# EAGLE board stir-shield (EAGLE 9.3.0)
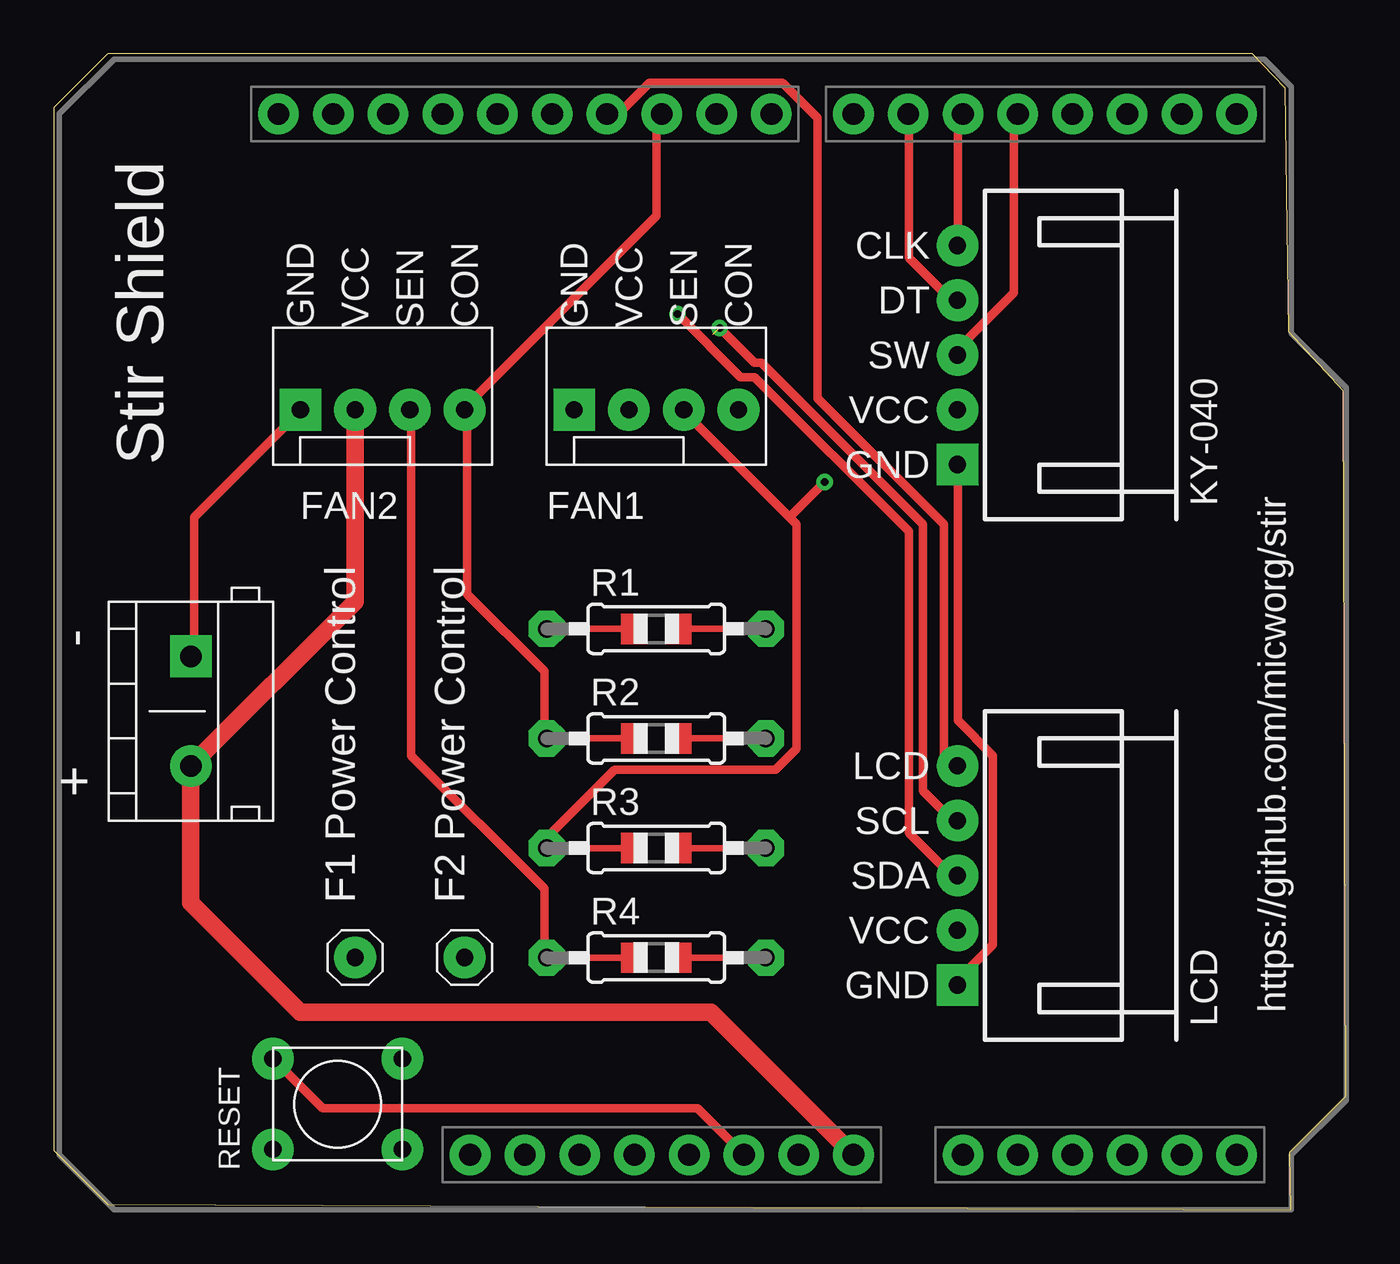
[diagram p0: board, top side]
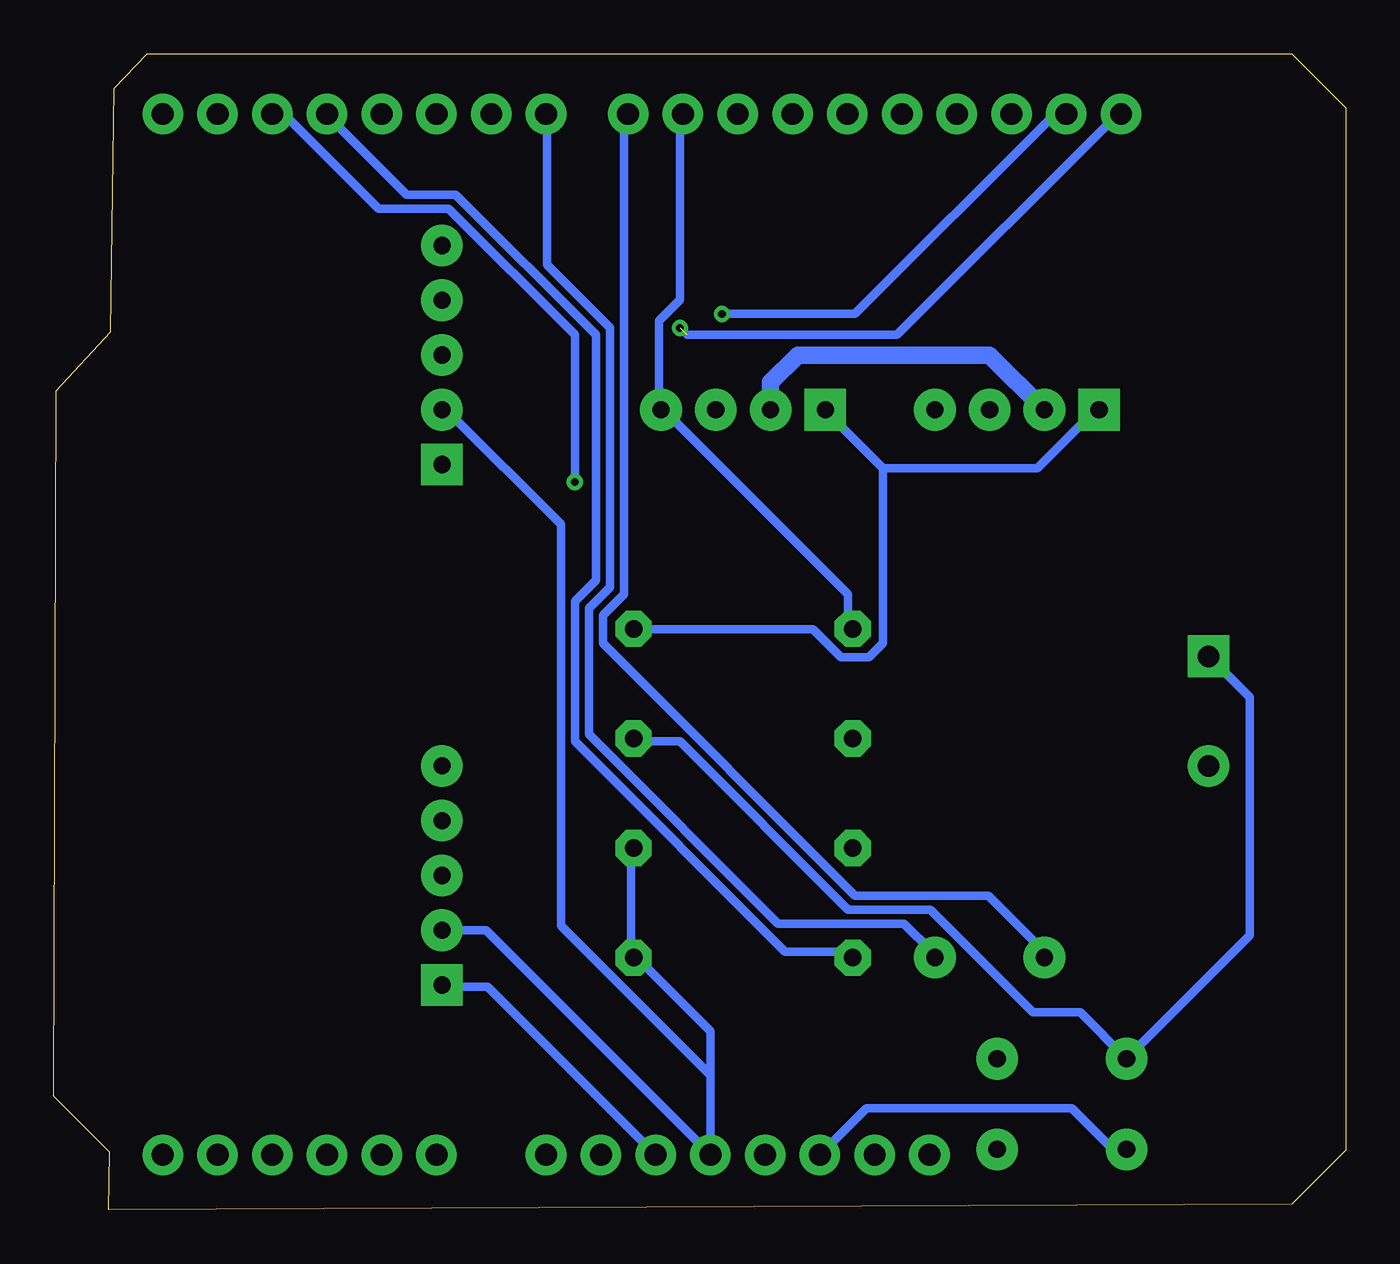
[diagram p1: board, bottom side, seen from below]

Size 59.91 x 53.58 mm. Coordinates in mm from the lower left corner, seen from the top.
Outline: 0,51.08 0,2.75 2.5,0.25 57.37,0 57.32,2.66 59.91,5.27 59.81,37.97 57.28,40.7 57.12,51.99 55.59,53.58 2.5,53.58 0,51.08
Copper layers (1*16): Top 0.035mm / dielectric 1.5mm / Bottom 0.035mm
Design rules "default": minimum track width 6mil, minimum drill 0.35mm, track to track 6mil, track to pad 6mil, pad to pad 6mil, via to via 6mil, smd to smd 6mil, copper to edge 40mil, drill to drill 6mil, minimum pad ring 10mil, minimum via ring 8mil, stop-mask expansion 4mil, vias tented up to drill 0mil, thermal gap 10mil
Net classes: 0 default: width 0.4 mm, clearance 0.25 mm

## Footprints (pad centres in the part's own frame; a part is rotated, then mirrored left to right if it is on the bottom)
UNO_R3_SHIELD_NOLABELS = drill 1.016 pad 1.88: 3.3V 24.13,-3.81; 5V 24.13,-1.27; A0 24.13,11.43; A1 24.13,13.97; A2 24.13,16.51; A3 24.13,19.05; A4 24.13,21.59; A5 24.13,24.13; AREF -24.13,-15.24; D2 -24.13,19.05; D3 -24.13,16.51; D4 -24.13,13.97; D5 -24.13,11.43; D6 -24.13,8.89; D7 -24.13,6.35; D8 -24.13,2.54; D9 -24.13,0; D10 -24.13,-2.54; D11 -24.13,-5.08; D12 -24.13,-7.62; D13 -24.13,-10.16; GND@0 24.13,1.27; GND@1 24.13,3.81; GND@2 -24.13,-12.7; IOREF 24.13,-8.89; NC 24.13,-11.43; RES 24.13,-6.35; RX -24.13,24.13; SCL -24.13,-20.32; SDA -24.13,-17.78; TX -24.13,21.59; VIN 24.13,6.35
4PIN = drill 0.8 pad 1.93 square: P$1 0,0 | drill 0.8 pad 1.93: P$2 2.54,0; P$3 5.08,0; P$4 7.62,0
1PIN = drill 0.8 pad 1.93: P$1 0,0
5PIN_KY-04 = drill 0.8 pad 1.93 square: P$1 0,0 | drill 0.8 pad 1.93: P$2 2.54,0; P$3 5.08,0; P$4 7.62,0; P$5 10.16,0
5PIN_LCD = drill 0.8 pad 1.93 square: P$1 0,0 | drill 0.8 pad 1.93: P$2 2.54,0; P$3 5.08,0; P$4 7.62,0; P$5 10.16,0
0805-THM = drill 0.813 pad 1.676 octagon: 1 -5.08,0; 2 5.08,0
BUTTON = drill 0.8 pad 1.93: P$1 0,0; P$2 4.2,0; P$3 0,-6; P$4 4.2,-6
2PIN = drill 1 pad 1.93 square: P$1 0,0 | drill 1 pad 1.93: P$2 5.08,0

## Placement (x,y rotation side)
B1  ARDUINO_UNO_R3_SHIELDNOLABELS  [UNO_R3_SHIELD_NOLABELS]  30.73,26.67 270 top
FAN1  4PIN  [4PIN]  24.13,37.08 0 top
FAN1-POW-CON  1PIN  [1PIN]  13.97,11.68 0 top
FAN2  4PIN  [4PIN]  11.43,37.08 0 top
FAN2_POW_CON  1PIN  [1PIN]  19.05,11.68 0 top
KY-040  5PIN_KY-04  [5PIN_KY-04]  41.91,34.54 90 top
LCD  5PIN_LCD  [5PIN_LCD]  41.91,10.41 90 top
R1  [0805-THM]  27.94,26.92 0 top
R2  [0805-THM]  27.94,21.84 0 top
R3  [0805-THM]  27.94,16.76 0 top
R4  [0805-THM]  27.94,11.68 0 top
RESET  BUTTON  [BUTTON]  10.16,2.79 90 top
U$1  2PIN  [2PIN]  6.35,25.65 270 top

## Library data of the parts
B1 = SparkFun-Boards
FAN1 FAN1-POW-CON FAN2 FAN2_POW_CON KY-040 LCD RESET U$1 = stir_shield
R1-R4 = adafruit

## Nets
N$1: B1.D8 FAN1-POW-CON.P$1
N$2: B1.VIN FAN1.P$2 FAN2.P$2 U$1.P$2
N$3: B1.D9 FAN1.P$4 R1.1
N$4: B1.D10 FAN2.P$4 R2.1
N$5: B1.5V KY-040.P$2 LCD.P$2 R3.2 R4.2
N$6: B1.D2 FAN1.P$3 R3.1
N$7: B1.D3 FAN2.P$3 R4.1
N$8: B1.D11 LCD.P$5
N$9: B1.D7 FAN2_POW_CON.P$1
N$10: B1.SCL LCD.P$4
N$11: B1.SDA LCD.P$3
N$12: B1.D4 KY-040.P$3
N$13: B1.D6 KY-040.P$4
N$14: B1.D5 KY-040.P$5
N$18: B1.GND@0 FAN1.P$1 FAN2.P$1 KY-040.P$1 LCD.P$1 R1.2 R2.2 RESET.P$2 U$1.P$1
RESET: B1.RES RESET.P$1

## Tracks (layer width: path | path; a pad name or v marks a point on that pad's centre or on a via)
N$1
  Bottom 0.4: B1.D8 33.48,50.63 33.48,28.53 34.45,27.55 34.45,26.25 22.75,14.55 16.57,14.55 13.97,11.95 FAN1-POW-CON.P$1
N$2
  Top 0.813: FAN2.P$2 13.97,28.19 U$1.P$2 6.35,14.22 11.43,9.14 30.48,9.14 B1.VIN
  Bottom 0.813: FAN2.P$2 16.51,39.62 25.4,39.62 26.67,38.35 FAN1.P$2
N$3
  Bottom 0.4: R1.1 23.07,27.23 23.07,28.53 31.52,36.98 FAN1.P$4 31.85,37.3 31.85,41.2 30.88,42.18 30.88,50.63 B1.D9
N$4
  Top 0.4: R2.1 22.75,22.03 22.75,24.95 19.18,28.53 19.18,36.98 FAN2.P$4 19.18,37.3 27.95,46.08 27.95,50.63 B1.D10
N$5
  Bottom 0.4: 41.6,12.93 LCD.P$2 39.88,12.95 B1.5V | KY-040.P$2 41.6,36.98 36.4,31.78 36.4,13.16 29.46,6.22 B1.5V | 33.15,16.83 R3.2 33.15,16.5 33.15,11.95 R4.2 32.83,11.63 29.46,8.27 B1.5V
N$6  (via drill 0.35)
  Top 0.4: 34.12,32.1 29.25,36.98 FAN1.P$3 | 34.12,32.1 34.45,31.78 34.45,21.38 33.48,20.4 26,20.4 22.75,17.15 22.75,16.83 R3.1 | 34.12,32.1 v35.75,33.73
  Bottom 0.4: v35.75,33.73 35.75,40.55 41.6,46.4 44.85,46.4 49.08,50.63 49.73,50.63 B1.D2
N$7
  Top 0.4: R4.1 22.75,11.95 22.75,14.88 16.57,21.05 16.57,36.98 FAN2.P$3
  Bottom 0.4: B1.D3 47.12,50.63 43.55,47.05 41.27,47.05 34.77,40.55 34.77,29.18 35.75,28.2 35.75,21.7 26,11.95 23.07,11.95 R4.1
N$8
  Top 0.4: B1.D11 25.68,50.95 26.32,50.95 27.62,52.25 33.8,52.25 35.42,50.63 35.42,37.63 41.27,31.78 41.27,21.05 41.6,20.73 LCD.P$5
N$9
  Bottom 0.4: B1.D7 37.05,50.63 37.05,43.8 34.12,40.88 34.12,28.85 35.1,27.88 35.1,22.03 26.32,13.25 20.48,13.25 19.18,11.95 FAN2_POW_CON.P$1
N$10  (via drill 0.35)  (1 unrouted)
  Top 0.4: v30.88,40.88 32.5,39.25 32.83,39.25 40.3,31.78 40.3,19.43 41.6,18.13 LCD.P$4
  Bottom 0.4: 30.55,40.55 20.8,40.55 10.72,50.63 B1.SCL
N$11  (via drill 0.35)
  Top 0.4: v28.93,41.53 31.85,38.6 32.5,38.6 39.65,31.45 39.65,17.48 41.6,15.53 LCD.P$3
  Bottom 0.4: v28.93,41.53 22.75,41.53 13.65,50.63 13,50.63 B1.SDA
N$12
  Top 0.4: B1.D4 44.52,50.63 44.52,42.5 41.92,39.9 KY-040.P$3
N$13
  Top 0.4: B1.D6 39.65,50.63 39.65,44.13 41.6,42.18 KY-040.P$4
N$14
  Top 0.4: B1.D5 41.92,50.63 41.92,44.78 KY-040.P$5
N$18
  Top 0.4: KY-040.P$1 41.92,34.38 41.92,22.68 43.55,21.05 43.55,12.28 41.92,10.65 LCD.P$1 | U$1.P$1 6.5,25.93 6.5,32.1 11.38,36.98 FAN2.P$1 | RESET.P$2 12.46,4.7 29.84,4.7 B1.GND@0
  Bottom 0.4: LCD.P$1 41.6,10.33 39.79,10.33 B1.GND@0 | 21.45,34.38 21.45,26.25 22.1,25.6 23.4,25.6 24.7,26.9 32.83,26.9 R1.2 | 21.45,34.38 24.05,36.98 FAN1.P$1 | 21.45,34.38 14.3,34.38 11.7,36.98 FAN2.P$1 | 23.07,13.9 23.13,13.96 | 23.13,13.96 30.88,21.7 32.83,21.7 R2.2 | U$1.P$1 4.45,23.75 4.45,12.71 RESET.P$2 12.31,9.14 14.51,9.14 19.27,13.9 23.02,13.9 23.07,13.96 23.13,13.96
RESET
  Bottom 0.4: RESET.P$1 10.79,2.79 12.7,4.7 22.23,4.7 B1.RES

## Text on the board
tNames: Stir Shield | F1 Power Control | F2 Power Control | https://github.com/micworg/stir